# Altium PCB gprs_0v1.PcbDoc
Units mm, origin at the board's own origin, x right, y up, seen from the top; angles counter-clockwise.
Board outline 100 x 50 mm, 2 copper layers (Top Layer, Bottom Layer); 62 components, 72 nets, 259 pads, 93 vias.
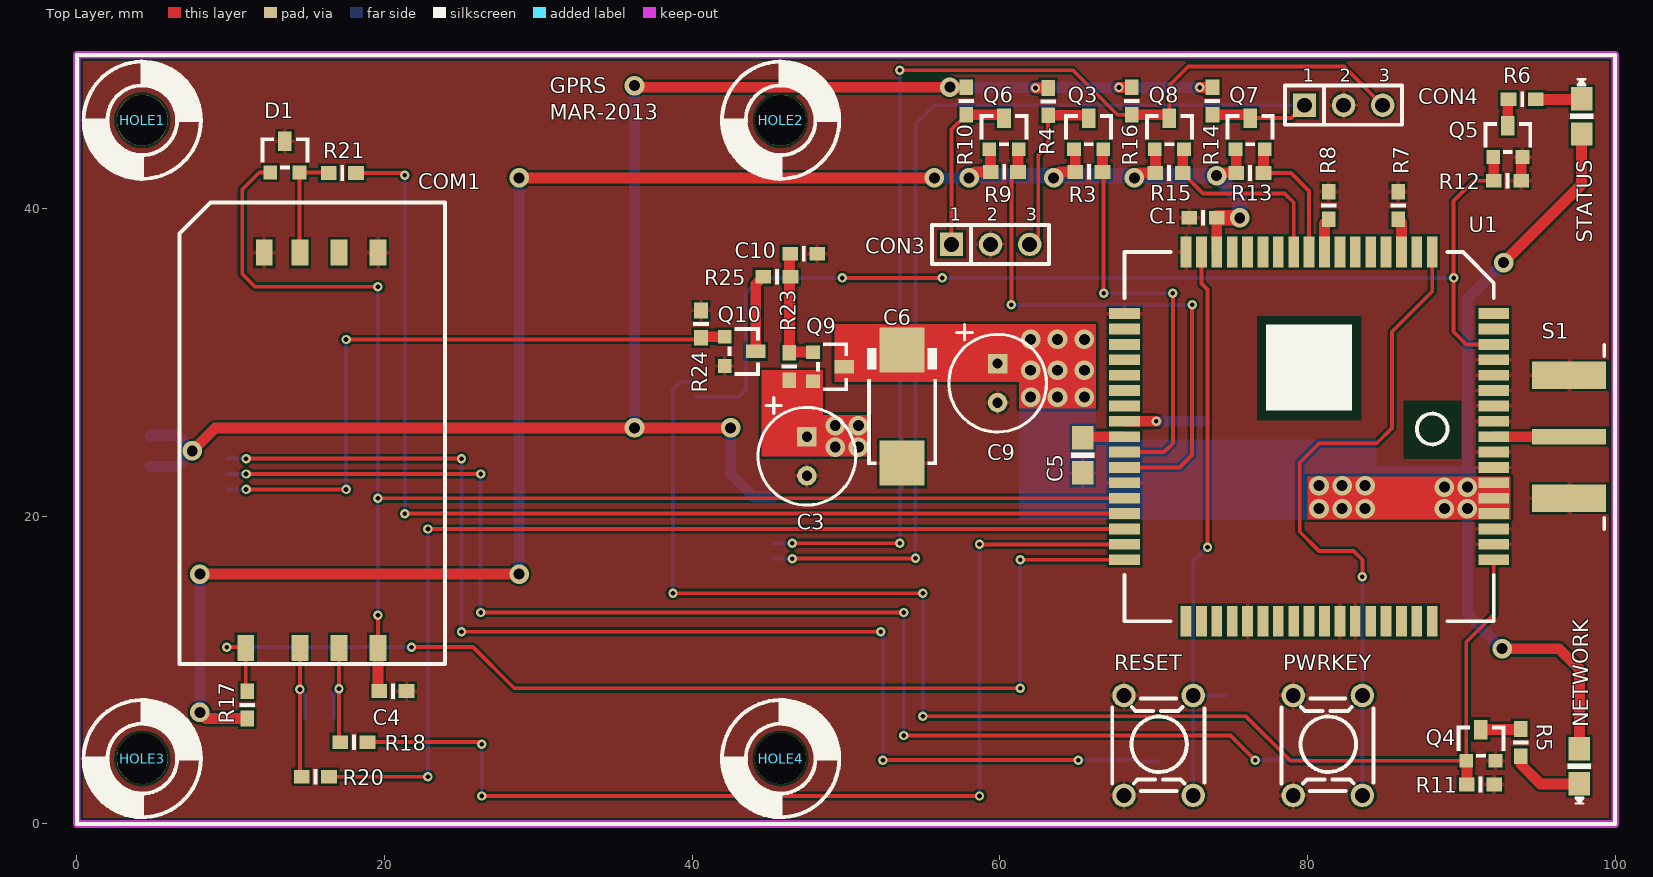
[diagram p0: Top Layer view]
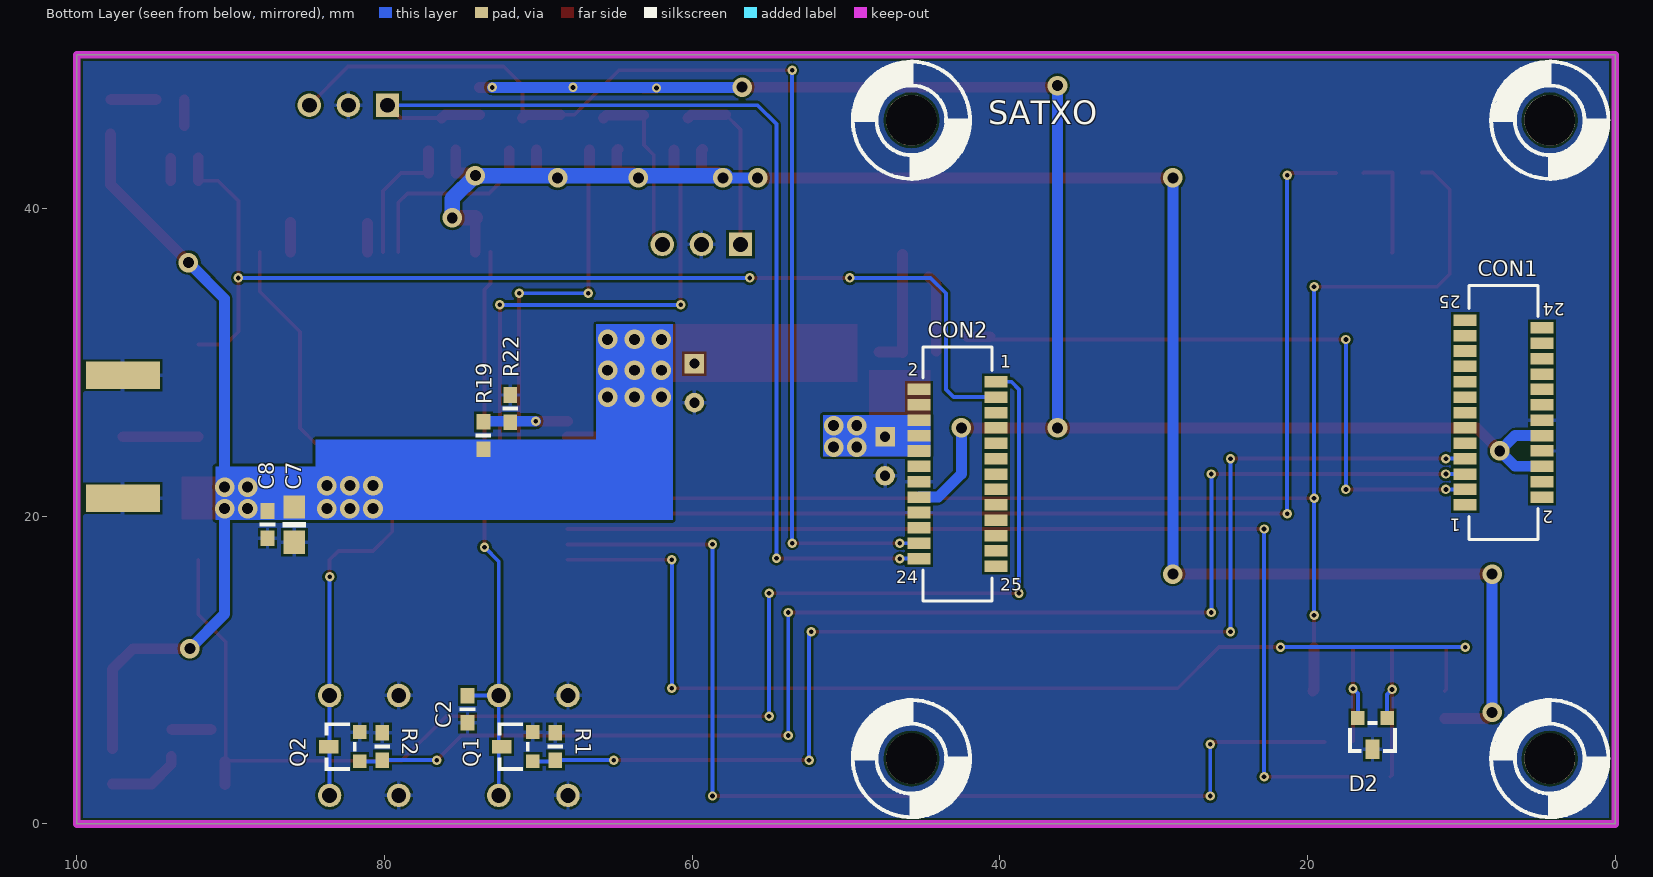
[diagram p1: Bottom Layer view, seen from below]

## Layer stack, top to bottom
Top Layer: signal copper 0.0356
Dielectric: dielectric 0.32, FR-4, Dk 4.8
Bottom Layer: signal copper 0.0356

## Board outline
0,0 100,0 100,50 0,50

## Design rules (kind name [scope] priority, off if disabled: settings)
Clearance [All] p1: gap=0.152
HoleSize [All] p1: absolutevalues=TRUE maxlimit=2.54 minlimit=0.305 maxpercent=80.000 minpercent=20.000
PolygonConnect [All] p1: connectstyle=Relief reliefconductorwidth=0.254 reliefentries=4 polygonreliefangle="90 Angle"
RoutingVias [All] p1: holewidth=0.508 width=0.762 viastyle="Through Hole" minholewidth=0.305 minwidth=0.61 maxholewidth=0.711 maxwidth=1.27
SilkscreenOverComponentPads [All] p1: minsilkscreentomaskgap=0.254
SolderMaskExpansion [All] p1: expansion=0.102
Width [All] p1: maxlimit=2.54 minlimit=0.152 preferedwidth=0.254
26 further rules are at their usual default settings.

## Components (designator, comment, footprint, x,y, rotation, side; value= is the part's Value field where it differs from the comment)
C1 "100nF" 0603 72.321,39.408 r0 top
C2 "100nF" 0603 74.608,6.571 r90 bottom
C3 "100uF" RADIAL-2.5MM 47.458,25.179 r270 top
C4 "220nF" 0603 21.429,8.642 r180 top
C5 "4.7uF" 0805 65.392,22.821 r90 top
C6 "470uF" CASE-D 53.642,30.821 r90 top
C7 "4.7uF" 0805 85.858,18.321 r90 bottom
C8 "100nF" 0603 87.608,18.571 r90 bottom
C9 "100uF" RADIAL-2.5MM 59.858,29.929 r270 top
C10 "100nF" 0603 48.142,37.071 r180 top
COM1 "SIM CARD" SIMCARD-8 15.679,37.142 r270 top
CON1 "25P" DF9-25-MIRROR 4.75,20.75 r0 bottom
CON2 "25P" DF9-25-MIRROR 45.249,28.75 r180 bottom locked
CON3 "3P" SIP-3 56.858,37.679 r0 top
CON4 "3P" SIP-3 79.808,46.729 r0 top
D1 "BAT54A" SOT-23 12.571,42.358 r0 top
D2 "BAT54A" SOT-23 14.821,6.892 r0 bottom
HOLE1 "HOLE" NPTH-3MM 4.25,45.75 r0 top locked
HOLE2 "HOLE" NPTH-3MM 45.75,45.75 r0 top locked
HOLE3 "HOLE" NPTH-3MM 4.25,4.25 r0 top locked
HOLE4 "HOLE" NPTH-3MM 45.75,4.25 r0 top locked
NETWORK "LED" 0805@DIODE 97.679,4.892 r270 top
PWRKEY "SW1" MICROSWITCH 79.071,8.358 r0 top
Q1 "BSS138" SOT-23@GSD 70.358,4.071 r90 bottom
Q2 "BSS138" SOT-23@GSD 81.608,4.071 r90 bottom
Q3 "BSS138" SOT-23@GSD 64.821,43.858 r0 top
Q4 "BSS138" SOT-23@GSD 90.321,4.108 r0 top
Q5 "BSS138" SOT-23@GSD 92.071,43.358 r0 top
Q6 "BSS138" SOT-23@GSD 59.321,43.858 r0 top
Q7 "BSS138" SOT-23@GSD 75.321,43.858 r0 top
Q8 "BSS138" SOT-23@GSD 70.071,43.858 r0 top
Q9 "SI2323DS" SOT-23@GSD 47.858,30.679 r270 top
Q10 "BSS138" SOT-23@GSD 42.108,31.679 r270 top
R1 "10K" 0603 68.892,5.929 r270 bottom
R2 "10K" 0603 80.142,5.929 r270 bottom
R3 "10K" 0603 66.679,42.392 r180 top
R4 "10K" 0603 63.142,46.071 r90 top
R5 "470R" 0603 93.858,6.179 r270 top
R6 "470R" 0603 93.071,47.108 r0 top
R7 "10K" 0603 85.892,39.321 r90 top
R8 "10K" 0603 81.392,39.321 r90 top
R9 "10K" 0603 61.179,42.392 r180 top
R10 "10K" 0603 57.821,46.108 r90 top
R11 "10K" 0603 92.142,2.571 r180 top
R12 "10K" 0603 93.892,41.821 r180 top
R13 "10K" 0603 77.142,42.321 r180 top
R14 "10K" 0603 73.821,46.108 r90 top
R15 "10K" 0603 71.892,42.321 r180 top
R16 "10K" 0603 68.571,46.108 r90 top
R17 "6K8" 0603 11.071,6.858 r90 top
R18 "22R" 0603 18.892,5.321 r180 top
R19 "DNI" 0603 73.571,26.142 r270 bottom
R20 "22R" 0603 16.392,3.071 r180 top
R21 "22R" 0603 18.142,42.321 r180 top
R22 "10K" 0603 71.821,27.892 r270 bottom
R23 "100K" 0603 46.321,28.858 r90 top
R24 "10K" 0603 40.571,31.608 r90 top
R25 "100" 0603 46.392,35.571 r180 top
RESET "SW1" MICROSWITCH 68.071,8.358 r0 top
S1 "SMA" SMA-JOHNSON-SCREW 99.546,20.408 r90 top
STATUS "LED" 0805@DIODE 97.821,44.858 r90 top
U1 "SIM900" SIM900 88.108,37.179 r270 top

## Footprints (in the part's own frame and the unit in brackets; to place one, negate y for a bottom-side part, rotate by r counter-clockwise, add the part's x,y. Pads: shape width x height; smd on the part's side, far side on the other; paste and mask are expansions set on the pad)
0603 [mil]
  rect 40x35 smd: 1(0,0) 2(70,0)
  silkscreen extent 30,-20 40,20
0805 [mil]
  rect 60x55 smd: 1(0,0) 2(90,0)
  silkscreen extent 38,-30 52,30
0805@DIODE [mil]
  rect 60x55 smd: A(0,0) K(90,0)
  silkscreen extent 38,-30 140,30
CASE-D [mil]
  rect 115x115 smd: 1(0,0) 2(-290,0)
  silkscreen extent -295,-90 5,90
DF9-25-MIRROR [mm] "Hirose DF9 25P CON"
  rect 1.5x0.75 smd: 1(5,0) 2(0,-0.5) 3(5,-1) 4(0,-1.5) 5(5,-2) 6(0,-2.5) 7(5,-3) 8(0,-3.5) 9(5,-4) 10(0,-4.5) 11(5,-5) 12(0,-5.5) 13(5,-6) 14(0,-6.5) 15(5,-7) 16(0,-7.5) 17(5,-8) 18(0,-8.5) 19(5,-9) 20(0,-9.5) 21(5,-10) 22(0,-10.5) 23(5,-11) 24(0,-11.5) 25(5,-12)
  silkscreen extent 0.25,-14.25 4.75,2.25
MICROSWITCH [mil]
  round 60 hole 38: 1(0,0) 2(177.16,0) 3(0,-255.91) 4(177.16,-255.91)
  silkscreen extent -30,-245 206,-8
NPTH-3MM [mil]
  round 130 hole 130 unplated: 1(0,0)
  silkscreen extent -150,-150 150,150
RADIAL-2.5MM [mil]
  rect 50x50 hole 26: 1(0,0)
  round 50 hole 26: 2(100,0)
  silkscreen extent -100,-125 175,125
SIM900 [mm]
  rect 2x0.7 smd: 1(0,0) 2(0,-1) 3(0,-2) 4(0,-3) 5(0,-4) 6(0,-5) 7(0,-6) 8(0,-7) 9(0,-8) 10(0,-9) 11(0,-10) 12(0,-11) 13(0,-12) 14(0,-13) 15(0,-14) 16(0,-15) 17(0,-16) 35(24,-16) 36(24,-15) 37(24,-14) 38(24,-13) 39(24,-12) 40(24,-11) 41(24,-10) 42(24,-9) 43(24,-8) 44(24,-7) 45(24,-6) 46(24,-5) 47(24,-4) 48(24,-3) 49(24,-2) 50(24,-1) 51(24,0)
  rect 0.7x2 smd: 18(4,-20) 19(5,-20) 20(6,-20) 21(7,-20) 22(8,-20) 23(9,-20) 24(10,-20) 25(11,-20) 26(12,-20) 27(13,-20) 28(14,-20) 29(15,-20) 30(16,-20) 31(17,-20) 32(18,-20) 33(19,-20) 34(20,-20) 52(20,4) 53(19,4) 54(18,4) 55(17,4) 56(16,4) 57(15,4) 58(14,4) 59(13,4) 60(12,4) 61(11,4) 62(10,4) 63(9,4) 64(8,4) 65(7,4) 66(6,4) 67(5,4) 68(4,4)
  silkscreen extent 0,-20 24,4
SIMCARD-8 [mm] "SIM CARD Holder"
  rect 1.7x1.1 smd: 1(25.7,3.9) 2(25.7,1.36) 3(25.7,-1.18) 4(0,3.9) 5(0,1.36) 6(0,-1.18) 7(25.7,-4.7) 8(0,-3.5)
  silkscreen extent -3.25,-9 26.75,8.25
SIP-3 [mil]
  rect 60x60 hole 38: 1(0,0)
  round 60 hole 38: 2(100,0) 3(200,0)
  silkscreen extent -50,-50 250,50
SMA-JOHNSON-SCREW [mil]
  rect 40x190 smd: 1(188,100)
  rect 70x190 smd far side: 2(30,100) 2(345,100)
  rect 70x190 smd: 2(30,100) 2(345,100)
  silkscreen extent -49,10 423,10
SOT-23 [mil]
  rect 35x35 smd: 1(0,0) 2(75,0)
  rect 35x50 smd: 3(37.5,80)
  silkscreen extent -25,8 100,90
SOT-23@GSD [mil] "SOT-23 (1-Gate , 2-Source, 3-Drain)"
  rect 35x50 smd: D(37.5,80)
  rect 35x35 smd: G(0,0) S(75,0)
  silkscreen extent -25,8 100,90

## Part data
C1 C2 C4 C5 C7 C8 C10: library part CAP, "Capacitor"
C3 C6 C9: library part "CAP POL", "Polarized Capacitor"
COM1: library part SIMCARD, "SIMCARD holder"
CON1 CON2: library part CON25, "Connector 25 Pins"
CON3 CON4: library part CON03, "Connector 3 pins"
D1 D2: "Dual Schottky Barrier Diode"
HOLE1 HOLE2 HOLE3 HOLE4: library part "PCB HOLE", "PCB Fixation Hole M3"
NETWORK STATUS: "Light emitting diode"
PWRKEY RESET: "Switch Push Button"
Q1 Q2 Q3 Q4 Q5 Q6 Q7 Q8 Q10: library part MOSFET-N, "N-Channel Logic Level Enhancement Mode Field Effect Transistor"
Q9: library part MOSFET-P, "P-Channel Logic Level Enhancement Mode Field Effect Transistor"
R1 R2 R3 R4 R5 R6 R7 R8 R9 R10 R11 R12 R13 R14 R15 R16 R17 R18 R19 R20 R21 R22 R23 R24 R25: library part RES, "Resistor"
S1: "SMA to PCB - Coaxial connector"

## Via types
v1: diameter 0.61, hole 0.305, Top Layer to Bottom Layer, 53 vias
v2: diameter 1.27, hole 0.711, Top Layer to Bottom Layer, 40 vias

## Nets (pads, with @x,y where several pads share a name; then routed paths per layer and width w, separated by ;. In a path a pad name is that pad's centre, name@x,y a point inside that pad or via, vN(x,y) a via of type N, cw(c..) or ccw(c..) an arc to the next point about the centre after c; other vN are vias at no path point)
1WIRE_SN: CON1.1
A3V3: CON2.12
ADC: R19.1 R22.2 U1.25 | length 5.2
  Top Layer w0.7: U1.25 v1(70.179,26.179)
  Bottom Layer w0.7: v1(70.179,26.179) R19.1@73.358,26.179
D2V8: C1.2 Q3.G Q6.G Q7.G Q8.G R3.2 R9.2 R13.2 R15.2 R17.1 U1.15 | length 123
  Top Layer w0.7: v2(8,7.25) 8.392,6.858 R17.1 ; v2(8,16.25) v2(28.75,16.25) ; v2(28.75,42) v2(55.75,42) ; v2(58,42) 58.392,42.392 R9.2 59.401,43.778 Q6.G ; v2(63.5,42) 63.892,42.392 R3.2 64.901,43.778 Q3.G ; v2(68.75,42) 69.071,42.321 R15.2 Q8.G@70.114,43.815 ; U1.15 C1.2@74.108,39.399 ; v2@74.269,42.321 R13.2 Q7.G@75.364,43.815
  Top Layer w1: C1.2 v2@75.592,39.408
  Bottom Layer w0.7: v2(8,7.25) v2(8,16.25) ; v2(28.75,16.25) v2(28.75,42) ; v2(55.75,42) v2(58,42)
  Bottom Layer w1: v2@57.849,42.151 v2(74.099,42.151) 75.599,40.651 v2(75.599,39.401)
D3V3: CON1.6 CON1.10 CON2.16 R4.2 R10.2 R14.2 R16.2 | length 110.9
  Top Layer w0.7: v2(7.5,24.25) 9,25.75 v2(36.25,25.75) v2(42.5,25.75) ; v2(36.25,48) 36.347,47.903 56.983,47.903 v2@57,47.886 ; v2@57,47.886 R10.2 ; v1(62.321,47.849) R4.2 ; v1(67.75,47.886) R16.2 ; v1(73,47.886) R14.2
  Bottom Layer w0.7: CON1.6 6.5,23.25 v2(7.5,24.25) 6.5,25.25 CON1.10 ; v2(36.25,25.75) v2(36.25,48) ; v2(42.5,25.75) 42.5,22.75 44,21.25 CON2.16 ; v2@56.75,47.886 v1(73,47.886)
  other v2: 56.75,47.903
DBG_RX: Q6.S R9.1 U1.28 | length 36.5
  Top Layer w0.25: v1(60.75,33.75) 60.75,41.963 R9.1 ; U1.28 71.679,23.179 72.5,24 v1(72.5,33.75)
  Top Layer w0.7: R9.1 Q6.S@61.179,43.811
  Bottom Layer w0.25: v1(60.75,33.75) v1(72.5,33.75)
DBG_RX33: CON3.1 Q6.D R10.1 | length 11.4
  Top Layer w0.25: CON3.1 56.858,45.145 R10.1
  Top Layer w0.7: R10.1 60.056,46.108 Q6.D
DBG_TX: Q3.S R3.1 U1.27 | length 27
  Top Layer w0.25: R3.1 66.75,42.321 v1(66.75,34.5) ; U1.27 70.679,24.179 71.25,24.75 v1(71.25,34.5)
  Top Layer w0.7: R3.1 Q3.S@66.679,43.811
  Bottom Layer w0.25: v1(66.75,34.5) v1(71.25,34.5)
DBG_TX33: CON3.3 Q3.D R4.1 | length 11.6
  Top Layer w0.25: CON3.3 62.5,38.241 62.5,43.5 63.142,44.142 R4.1
  Top Layer w0.7: R4.1 65.593,46.071 Q3.D
EN_GPRS_VDD: CON1.3 Q10.G R24.1 | length 41.9
  Top Layer w0.25: v1(11,21.75) v1(17.5,21.75) ; v1(17.5,31.5) R24.1@40.463,31.5
  Top Layer w0.7: R24.1@40.642,31.679 Q10.G
  Bottom Layer w0.25: CON1.3 v1(11,21.75) ; v1(17.5,21.75) v1(17.5,31.5)
GND: C1.1 C2.1 C3.2 C4.1 C5.1 C6.2 C7.1 C8.1 C9.2 C10.1 COM1.4 COM1.8 CON1.8 CON1.12 CON2.14 CON2.18 CON3.2 CON4.2 D1.3 D2.3 PWRKEY.1 PWRKEY.3 Q1.S Q2.S Q4.S Q5.S Q10.S R1.1 R2.1 R7.2 R8.2 R11.1 R12.1 R22.1 R24.2 RESET.1 RESET.3 S1.2 U1.17 U1.18 U1.29 U1.39 U1.45 U1.46 U1.53 U1.54 U1.58 U1.59 U1.61 U1.62 U1.63 U1.64 U1.65 | length 1.5
  Top Layer w0.7: R12.1 Q5.S@93.892,43.274
NetC5_2: C5.2 U1.26 | length 2.7
  Top Layer w0.7: C5.2@65.392,25.179 U1.26
NetC10_2: C10.2 Q9.G R23.2 R25.1 | length 7.9
  Top Layer w0.7: C10.2@46.321,37.028 R23.2 46.364,30.679 Q9.G
NETLIGHT: CON2.1 Q4.G R11.2 U1.52 | length 90.8
  Top Layer w0.25: v1(38.75,15) v1(55,15) ; v1@55.25,7 76,7 78.892,4.108 Q4.G 90.321,11.821 92.108,13.608 U1.52
  Top Layer w0.7: R11.2 Q4.G@90.364,4.065
  Bottom Layer w0.25: v1(38.75,15) 38.75,28.25 39.25,28.75 CON2.1 ; v1(55,7) v1(55,15)
NetNETWORK_K: NETWORK.K R5.2 | length 4.9
  Top Layer w0.7: R5.2 93.858,3.892 95.144,2.606 NETWORK.K
NetQ4_D: Q4.D R5.1 | length 2.5
  Top Layer w0.7: Q4.D R5.1@93.819,6.14
NetQ5_D: Q5.D R6.1 | length 1.7
  Top Layer w0.7: Q5.D R6.1@93.024,47.061
NetQ10_D: Q10.D R25.2 | length 5
  Top Layer w0.7: Q10.D 44.14,35.097 R25.2
NetR6_2: R6.2 STATUS.K | length 2.9
  Top Layer w0.7: R6.2 STATUS.K@97.785,47.108
NetR7_1: R7.1 U1.3 | length 1.9
  Top Layer w0.7: U1.3 R7.1@86.108,39.105
NetR8_1: R8.1 U1.8 | length 1.9
  Top Layer w0.7: U1.8 R8.1@81.108,39.037
NetR18_1: R18.1 U1.33 | length 69
  Top Layer w0.25: R18.1 26.179,5.321 v1(26.321,5.179) ; v1(26.321,1.821) v1(58.679,1.821) ; v1(58.679,18.179) U1.33
  Bottom Layer w0.25: v1(26.321,1.821) v1(26.321,5.179) ; v1(58.679,1.821) v1(58.679,18.179)
NetR20_1: R20.1 U1.32 | length 67.8
  Top Layer w0.25: R20.1 v1(22.821,3.071) ; v1(22.821,19.179) U1.32
  Bottom Layer w0.25: v1(22.821,3.071) v1(22.821,19.179)
NetR21_1: R21.1 U1.31 | length 72
  Top Layer w0.25: R21.1 21.179,42.321 v1(21.321,42.179) ; v1(21.321,20.179) U1.31
  Bottom Layer w0.25: v1(21.321,20.179) v1(21.321,42.179)
PB0: CON1.4
PB4: CON1.2
PE2: CON2.20
PE3: CON2.25
PE4: CON2.23
PE5: CON2.21
PE6: CON2.19
PE7: CON2.17
PF0: CON2.15
PF1: CON2.13
PF2: CON2.11
PF3: CON2.9
PF4: CON2.7
PF5: CON2.5
PG0: CON1.23
PG1: CON1.21
PG2: CON1.19
PG5: CON1.17
PWR33: CON1.5 Q2.G R2.2 | length 89.6
  Top Layer w0.25: v1(11,22.75) v1(26.25,22.75) ; v1(26.25,13.75) v1(53.75,13.75) ; v1(53.75,5.75) 75,5.75 v1(76.599,4.151)
  Bottom Layer w0.25: CON1.5 v1(11,22.75) ; v1(26.25,13.75) v1(26.25,22.75) ; v1(53.75,5.75) v1(53.75,13.75) ; v1(76.599,4.151) R2.2 80.222,4.071 Q2.G
PWRKEY: PWRKEY.2 PWRKEY.4 Q2.D U1.1 | length 44.1
  Top Layer w0.25: v1(83.571,16.071) 83.571,17.179 83,17.75 80.75,17.75 79.5,19 79.5,23.5 80.75,24.75 84.5,24.75 85.5,25.75 85.5,32 88.108,34.608 U1.1
  Bottom Layer w0.25: PWRKEY.4 PWRKEY.2 v1(83.571,16.071)
RF_ANT: S1.1 U1.60 | length 4.9
  Top Layer w0.7: U1.60 S1.1@97.002,25.179
RST33: CON1.7 Q1.G R1.2 | length 80
  Top Layer w0.25: v1(11,23.75) v1(25,23.75) ; v1(25,12.5) v1(52.25,12.5) ; v1(52.401,4.151) v1(65.099,4.151)
  Bottom Layer w0.25: CON1.7 v1(11,23.75) ; v1(25,12.5) v1(25,23.75) ; v1(52.25,12.5) 52.401,12.349 v1(52.401,4.151) ; v1(65.099,4.151) R1.2 ; R1.2@68.972,4.071 Q1.G
RSTN: C2.2 Q1.D RESET.2 RESET.4 U1.16 | length 37.9
  Top Layer w0.25: U1.16 73.108,35.142 73.5,34.75 v1(73.5,18)
  Bottom Layer w0.25: RESET.4 RESET.2 ; v1(73.5,18) 72.571,17.071 RESET.2 ; C2.2@74.599,8.358 RESET.2
RSTZ: CON1.25
SCL: CON1.15
SDA: CON1.13
SIM_CLK: COM1.3 D2.1 R20.2 | length 10.4
  Top Layer w0.25: COM1.3 14.499,8.751 v1(14.5,8.75) 14.5,3.185 R20.2
  Bottom Layer w0.25: v1(14.5,8.75) 14.821,8.429 D2.1
SIM_DATA: COM1.6 D1.2 R21.2 | length 7.1
  Top Layer w0.25: COM1.6 14.476,37.165 D1.2 16.327,42.358 R21.2
SIM_P: COM1.7 R17.2 U1.34 | length 71.9
  Top Layer w0.25: v1(9.75,11.5) 10.921,11.5 COM1.7 10.979,8.728 R17.2 ; v1(21.75,11.5) 25.75,11.5 28.429,8.821 v1(61.321,8.821) ; v1(61.321,17.179) U1.34
  Bottom Layer w0.25: v1(9.75,11.5) v1(21.75,11.5) ; v1(61.321,8.821) v1(61.321,17.179)
SIM_RST: COM1.2 D2.2 R18.2 | length 8.1
  Top Layer w0.25: R18.2@17.039,5.396 v1(17.039,8.789) COM1.2
  Bottom Layer w0.25: D2.2 16.726,8.476 v1(17.039,8.789)
SIM_VDD: C4.2 COM1.1 D1.1 U1.30 | length 91.8
  Top Layer w0.25: D1.1 11.858,42.358 10.75,41.25 10.75,35.75 11.571,34.929 v1(19.571,34.929) ; v1(19.571,13.571) 19.571,11.45 COM1.1 ; v1(19.571,21.179) U1.30
  Top Layer w0.7: COM1.1 19.579,8.714 C4.2
  Bottom Layer w0.25: v1(19.571,13.571) v1(19.571,21.179) v1(19.571,34.929)
STACK_BUS1: CON1.14
STACK_BUS2: CON1.16
STACK_BUS3: CON1.18
STACK_BUS4: CON1.20
STACK_BUS5: CON1.22
STACK_BUS6: CON1.24
STACK_BUS7: CON2.2
STACK_BUS8: CON2.4
STATUS: CON2.3 Q5.G R12.2 U1.66 | length 72.2
  Top Layer w0.25: v1(49.75,35.5) v1(56.25,35.5) ; U1.66 90.321,31.179 89.5,32 v1(89.5,35.5) 89.5,40.5 90.821,41.821 R12.2
  Top Layer w0.7: R12.2 Q5.G@92.114,43.315
  Bottom Layer w0.25: CON2.3 43,27.75 43.5,28.25 43.5,34.5 44.5,35.5 v1(49.75,35.5) ; v1(56.25,35.5) v1(89.5,35.5)
UART0_RX: CON2.24 CON4.1 Q7.D R14.1 | length 69.7
  Top Layer w0.25: v1@46.521,17.271 v1(54.521,17.271) ; Q7.D 78.969,45.89 CON4.1
  Top Layer w0.7: R14.1 76.056,46.108 Q7.D
  Bottom Layer w0.25: CON2.24 v1(46.5,17.25) ; v1(54.521,17.271) 54.521,45.5 55.75,46.729 CON4.1
UART0_TX: CON2.22 CON4.3 Q8.D R16.1 | length 75.4
  Top Layer w0.25: v1(46.5,18.25) v1(53.5,18.25) ; v1(53.5,49) 64.75,49 67.642,46.108 R16.1 ; Q8.D 71.024,48.024 72.25,49.25 82.367,49.25 CON4.3
  Top Layer w0.7: R16.1 70.806,46.108 Q8.D
  Bottom Layer w0.25: CON2.22 v1(46.5,18.25) ; v1(53.5,18.25) v1(53.5,49)
UART1_RX: CON1.11
UART1_TX: CON1.9
UART_RX: Q8.S R15.1 U1.10 | length 12.7
  Top Layer w0.25: R15.1 73.213,41 78.5,41 79.108,40.392 U1.10
  Top Layer w0.7: R15.1 Q8.S@71.892,43.774
UART_TX: Q7.S R13.1 U1.9 | length 8.9
  Top Layer w0.25: R13.1 78.929,42.321 80.108,41.142 U1.9
  Top Layer w0.7: R13.1 Q7.S@77.142,43.774
VBAT: C3.1 CON2.6 CON2.8 CON2.10 Q9.S R23.1
  other v2: 49.3,24.5 50.8,24.5 49.3,25.9 50.8,25.9
VBAT_900: C6.1 C7.2 C8.2 C9.1 NETWORK.A Q9.D R19.2 STATUS.A U1.55 U1.56 U1.57 | length 46.8
  Top Layer w0.7: v2(92.65,11.4) 96.35,11.4 97.679,10.071 NETWORK.A ; v2(92.75,36.5) 97.821,41.571 STATUS.A
  Bottom Layer w0.7: v2(90.4,20.5) 90.4,13.65 v2(92.65,11.4) ; v2(90.4,21.9) 90.4,34.15 v2(92.75,36.5)
  other v2: 80.75,20.5 82.25,20.5 83.75,20.5 88.9,20.5 88.9,21.9 80.75,22 82.25,22 83.75,22 62,27.75 63.75,27.75 65.5,27.75 62,29.5 63.75,29.5 65.5,29.5 62,31.5 63.75,31.5 65.5,31.5
pads on no net: COM1.5 HOLE1.1 HOLE2.1 HOLE3.1 HOLE4.1 U1.2 U1.4 U1.5 U1.6 U1.7 U1.11 U1.12 U1.13 U1.14 U1.19 U1.20 U1.21 U1.22 U1.23 U1.24 U1.35 U1.36 U1.37 U1.38 U1.40 U1.41 U1.42 U1.43 U1.44 U1.47 U1.48 U1.49 U1.50 U1.51 U1.67 U1.68

## Polygon pours and split planes (outlines as drawn)
GND on Top Layer "GND" (solid, pour order 4): 0,50 100,50 100,0 0,0 0,50
GND on Bottom Layer "GND" (solid, pour order 6): 0,50 100,50 100,0 0,0 0,50

## Keep-outs
Keep-Out Layer:
  lines w0.5: 0,0 25,0 100,0 100,50 0,50 0,25 0,0

## Other copper
Top Layer:
  rectangle net VBAT: 44.5,25.8 48.5,29.5
  rectangle net VBAT: 44.5,23.9 51.5,26.6
  rectangle net VBAT_900: 61.25,27 66.25,28.75
  rectangle net VBAT_900: 49.25,28.75 66.25,32.5
  rectangle net VBAT_900: 80,19.8 93.2,22.6
  pour cut-out: 86.25,27.5 86.25,23.75 90,23.75 90,27.5
  pour cut-out: 76.75,33 83.5,33 83.5,26.25 76.75,26.25
Bottom Layer:
  rectangle net VBAT: 44.5,23.9 51.5,26.6
  rectangle net VBAT_900: 61.25,19.75 66.25,32.5
  rectangle net VBAT_900: 61.25,19.75 84.5,25
  rectangle net VBAT_900: 84.5,19.75 91,23.25

## Silkscreen, mask and mechanical layers (free items; w line width, h text height)
Top Overlay:
  the board outline again, w0.254
  text "GPRS" at 30.75,47.5 h1
  text "MAR-2013" at 30.75,45.778 h1
Bottom Overlay:
  text "SATXO" at 40.75,45.5 h1.52

## Text inside footprints (layer, text, board x,y; h text height)
CON1: Bottom Overlay "25" at 10.025,34.35 h0.8 r180; Bottom Overlay "24" at 3.275,33.85 h0.8 r180; Bottom Overlay "2" at 4.025,20.35 h0.8 r180; Bottom Overlay "1" at 10.025,19.85 h0.8 r180
CON2: Bottom Overlay "25" at 39.974,15.15 h0.8; Bottom Overlay "24" at 46.724,15.65 h0.8; Bottom Overlay "2" at 45.974,29.15 h0.8; Bottom Overlay "1" at 39.974,29.65 h0.8
CON3: Top Overlay "3" at 61.684,39.203 h0.86; Top Overlay "1" at 56.731,39.203 h0.86; Top Overlay "2" at 59.144,39.203 h0.86
CON4: Top Overlay "3" at 84.634,48.253 h0.86; Top Overlay "1" at 79.681,48.253 h0.86; Top Overlay "2" at 82.094,48.253 h0.86